# EAGLE board MCU (EAGLE 9.6.0)
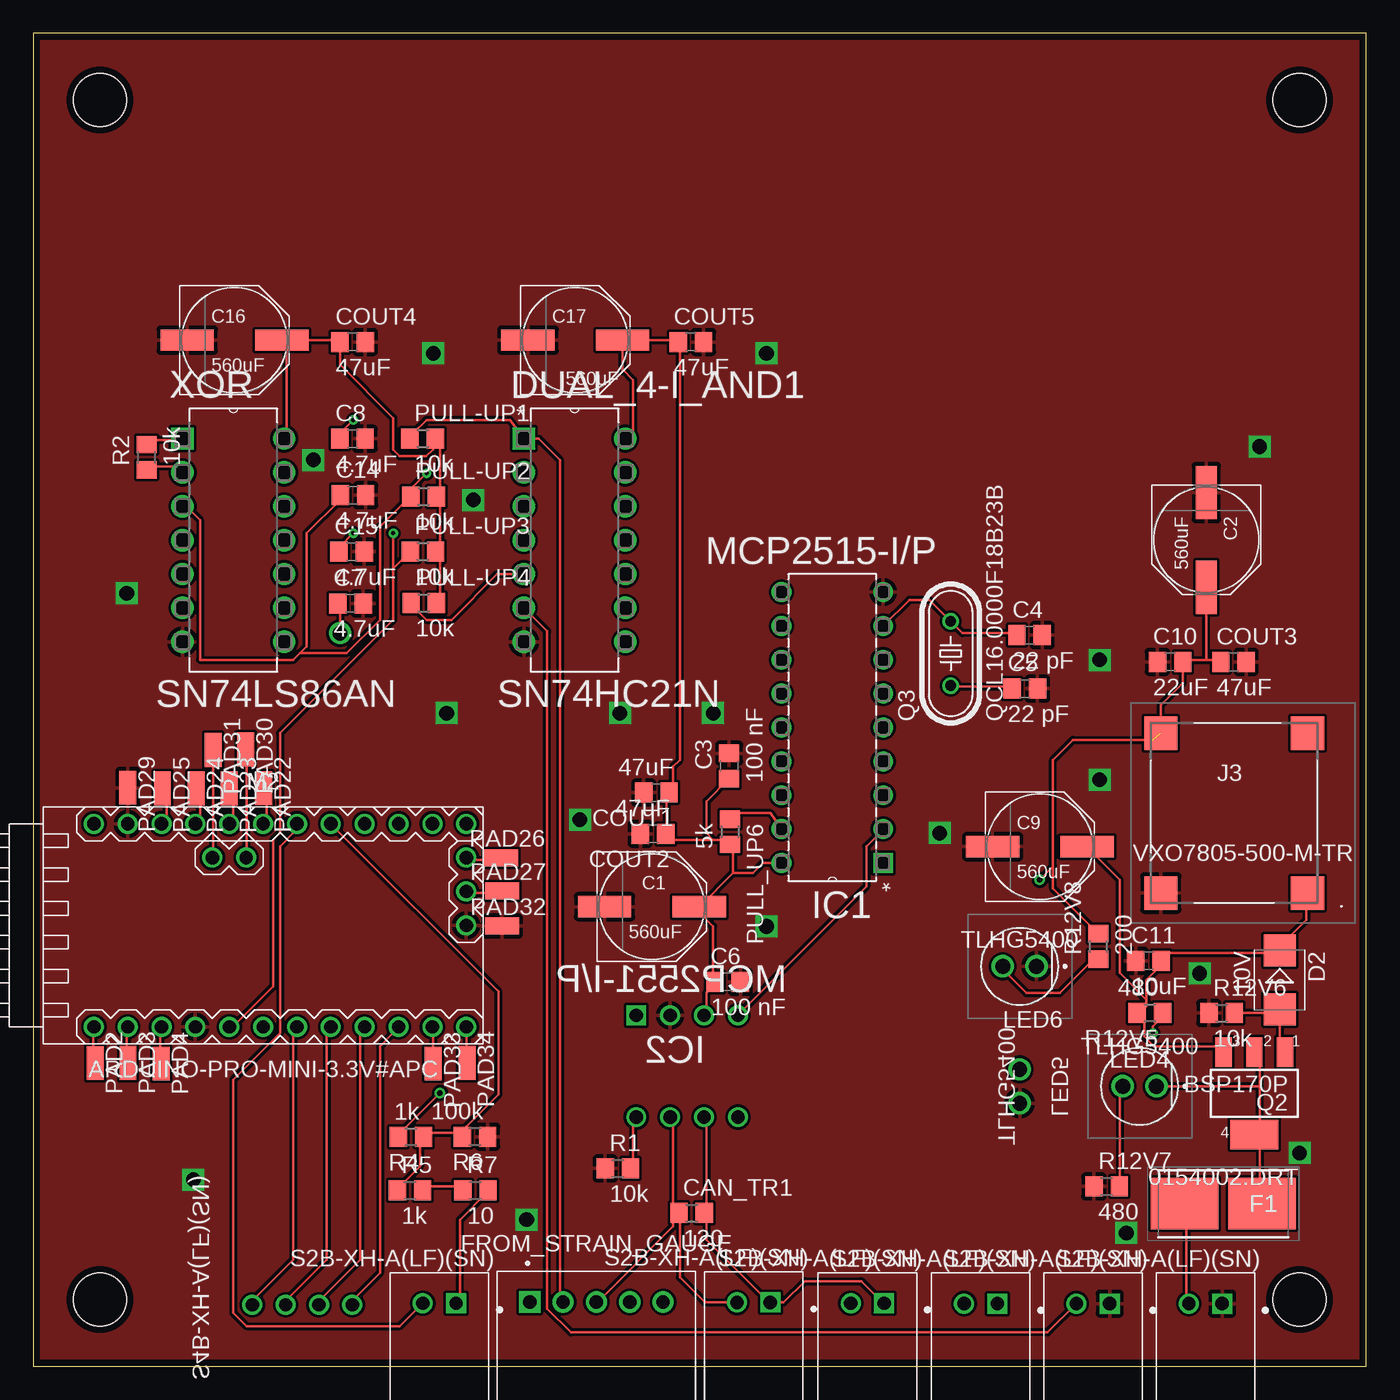
[diagram p0: board, top side]
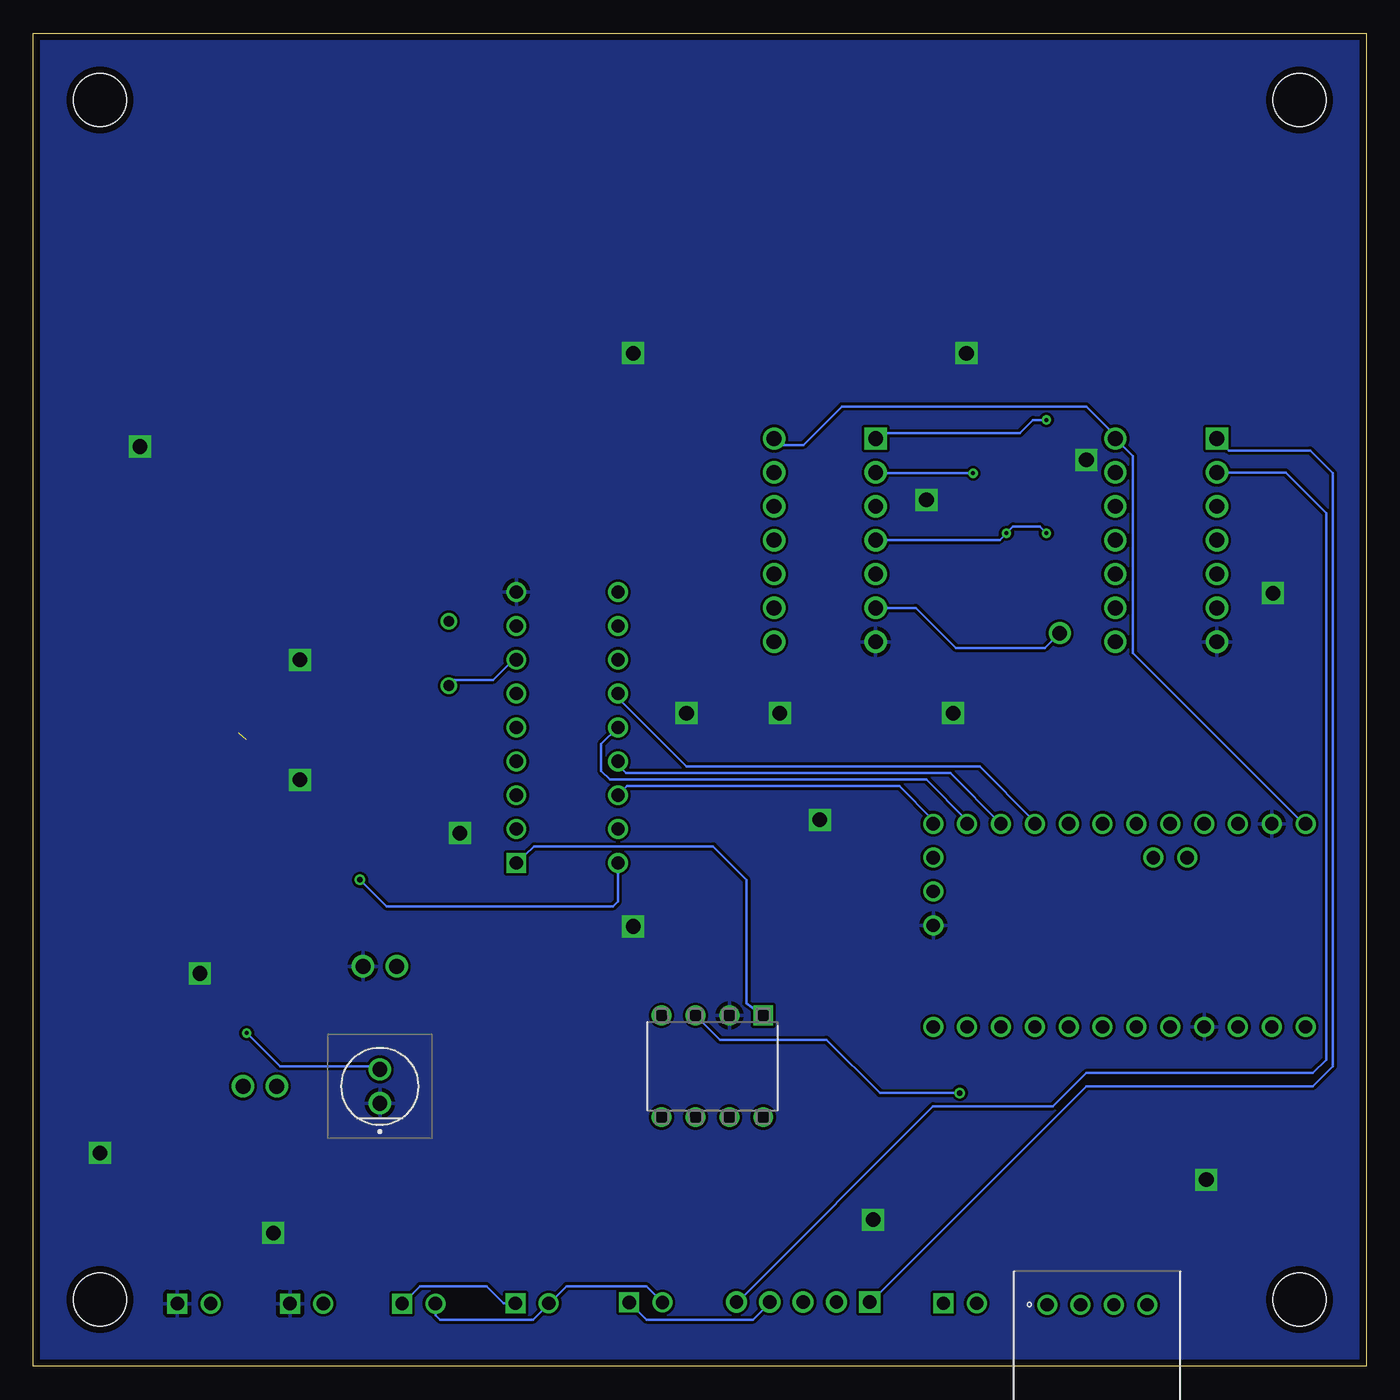
[diagram p1: board, bottom side, seen from below]

Size 100 x 100 mm. Coordinates in mm from the lower left corner, seen from the top.
Outline: 0,0 100,0 100,100 0,100 0,0
Copper layers (1*16): Top 0.035mm / dielectric 1.5mm / Bottom 0.035mm
Design rules "JLC_Vermilion2020": minimum track width 0.2mm, minimum drill 0.3mm, track to track 0.2mm, track to pad 0.3mm, pad to pad 0.3mm, via to via 0.2mm, smd to smd 0.2mm, copper to edge 0.5mm, drill to drill 0.25mm, minimum pad ring 0.2mm, minimum via ring 0.2mm, stop-mask expansion 0.055mm, vias tented up to drill 0.3mm, thermal gap 0.3mm
Net classes: 1 signal: width 0.3 mm, drill 0.4 mm, clearance 0.25 mm; 2 12V: width 1 mm, drill 1.1 mm, clearance 0.25 mm
Holes 4 mm at 5,95 5,5 95,5 95,95

## Footprints (pad centres in the part's own frame; a part is rotated, then mirrored left to right if it is on the bottom)
PANASONIC_F = smd 4 x 1.6: + 3.55,0; - -3.55,0
C0805 = smd 1.3 x 1.5: 1 -0.95,0; 2 0.95,0
JST_S2B-XH-A(LF)(SN) = drill 1 square: 1 -1.25,0 | drill 1: 2 1.25,0
R0805 = smd 1.3 x 1.5: 1 -0.95,0; 2 0.95,0
SMB = smd 2.4 x 2.4: A 2.2,0; C -2.2,0
DIP254P762X508-14 = drill 1.118 square: 1 -7.62,15.24 | drill 1.118: 2 -7.62,12.7; 3 -7.62,10.16; 4 -7.62,7.62; 5 -7.62,5.08; 6 -7.62,2.54; 7 -7.62,0; 8 0,0; 9 0,2.54; 10 0,5.08; 11 0,7.62; 12 0,10.16; 13 0,12.7; 14 0,15.24
FUSM9750X381N = smd 5.05 x 3.85: 1 -2.9,0; 2 2.9,0
JST_S5B-XH-A(LF)(SN) = drill 1 pad 1.59 square: 1 -5,0 | drill 1 pad 1.59: 2 -2.5,0; 3 0,0; 4 2.5,0; 5 5,0
DIP254P762X432-18 = drill 0.991 square: 1 -7.62,20.32 | drill 0.991: 2 -7.62,17.78; 3 -7.62,15.24; 4 -7.62,12.7; 5 -7.62,10.16; 6 -7.62,7.62; 7 -7.62,5.08; 8 -7.62,2.54; 9 -7.62,0; 10 0,0; 11 0,2.54; 12 0,5.08; 13 0,7.62; 14 0,10.16; 15 0,12.7; 16 0,15.24; 17 0,17.78; 18 0,20.32
DIP254P762X432-8 = drill 0.991 square: 1 -7.62,7.62 | drill 0.991: 2 -7.62,5.08; 3 -7.62,2.54; 4 -7.62,0; 5 0,0; 6 0,2.54; 7 0,5.08; 8 0,7.62
VXO7805500MTR = smd 2.5 x 2.5: 1 -5.5,6; 2 5.5,6; 3 5.5,-6; 4 -5.5,-6
TLHG5400 = drill 1.12 pad 1.68: 1 1.27,0; 2 -1.27,0
ARDUINO-PRO-MINI#APC = drill 1: J2.1 -1.27,5.08; J2.2 -3.81,5.08; J3.1 15.24,0; J3.2 15.24,2.54; J3.3 15.24,5.08; J6.1 -12.7,7.62; J6.2 -10.16,7.62; J6.3 -7.62,7.62; J6.4 -5.08,7.62; J6.5 -2.54,7.62; J6.6 0,7.62; J6.7 2.54,7.62; J6.8 5.08,7.62; J6.9 7.62,7.62; J6.10 10.16,7.62; J6.11 12.7,7.62; J6.12 15.24,7.62; J7.1 15.24,-7.62; J7.2 12.7,-7.62; J7.3 10.16,-7.62; J7.4 7.62,-7.62; J7.5 5.08,-7.62; J7.6 2.54,-7.62; J7.7 0,-7.62; J7.8 -2.54,-7.62; J7.9 -5.08,-7.62; J7.10 -7.62,-7.62; J7.11 -10.16,-7.62; J7.12 -12.7,-7.62
SMD1,27-2,54 = smd 1.27 x 2.54: 1 0,0
SOT223 = smd 1.219 x 2.235: 1 -2.311,-3.099; 2 0,-3.099; 3 2.311,-3.099 | smd 3.6 x 2.2: 4 0,3.099
HC49/S = drill 0.813: 1 -2.413,0; 2 2.413,0
S4B-XH-A(LF)(SN) = drill 1: 1 -0.02,3.75; 2 -0.02,1.25; 3 -0.02,-1.25; 4 -0.02,-3.75

## Placement (x,y rotation side)
C1  560uF  [PANASONIC_F]  46.4,34.47 0 top
C2  560uF  [PANASONIC_F]  88,62 270 top
C3  100 nF  [C0805]  52.2,45.04 90 top
C4  22 pF  [C0805]  74.74,54.84 0 top
C5  22 pF  [C0805]  74.39,50.84 0 top
C6  100 nF  [C0805]  52.09,28.84 0 top
C7  4.7uF  [C0805]  23.8,57.24 0 top
C8  4.7uF  [C0805]  23.94,69.59 0 top
C9  560uF  [PANASONIC_F]  75.52,38.98 0 top
C10  22uF  [C0805]  85.29,52.84 0 top
C11  10uF  [C0805]  83.66,30.42 0 top
C14  4.7uF  [C0805]  23.98,65.35 0 top
C15  4.7uF  [C0805]  23.88,61.11 0 top
C16  560uF  [PANASONIC_F]  15.09,76.98 0 top
C17  560uF  [PANASONIC_F]  40.66,76.98 0 top
CAN1  S2B-XH-A(LF)(SN)  [JST_S2B-XH-A(LF)(SN)]  71.08,4.69 180 top
CAN2  S2B-XH-A(LF)(SN)  [JST_S2B-XH-A(LF)(SN)]  62.58,4.72 180 top
CAN3  S2B-XH-A(LF)(SN)  [JST_S2B-XH-A(LF)(SN)]  54.04,4.79 180 top
CAN_TR1  120  [R0805]  49.39,11.49 0 top
COUT1  47uF  [C0805]  46.74,43.03 180 top
COUT2  47uF  [C0805]  46.49,39.95 180 top
COUT3  47uF  [C0805]  90.04,52.83 0 top
COUT4  47uF  [C0805]  23.95,76.84 0 top
COUT5  47uF  [C0805]  49.33,76.84 0 top
D2  10V  [SMB]  93.5,28.98 270 top
DUAL_4-I_AND1  SN74HC21N  [DIP254P762X508-14]  44.42,54.35 0 top
F1  0154002.DRT  [FUSM9750X381N]  89.28,12.19 0 top
FROM_BATTERY  S2B-XH-A(LF)(SN)  [JST_S2B-XH-A(LF)(SN)]  87.94,4.69 180 top
FROM_STRAIN_GAUGE  S5B-XH-A(LF)(SN)  [JST_S5B-XH-A(LF)(SN)]  42.25,4.82 0 top
FROM_TORQUE  S2B-XH-A(LF)(SN)  [JST_S2B-XH-A(LF)(SN)]  30.47,4.72 180 top
IC1  MCP2515-I/P  [DIP254P762X432-18]  56.14,58.08 180 top
IC2  MCP2551-I/P  [DIP254P762X432-8]  52.86,18.69 270 bottom
J3  VXO7805-500-M-TR  [VXO7805500MTR]  90.09,41.5 180 top
LED4  TLHG5400  [TLHG5400]  83,21 0 top
LED5  TLHG5400  [TLHG5400]  74,21 270 bottom
LED6  TLHG5400  [TLHG5400]  74,30 0 top
M2  ARDUINO-PRO-MINI-3.3V#APC  [ARDUINO-PRO-MINI#APC]  17.24,33.07 0 top
PAD2  [SMD1,27-2,54]  4.63,22.74 180 top
PAD3  [SMD1,27-2,54]  7.1,22.75 180 top
PAD4  [SMD1,27-2,54]  9.58,22.7 180 top
PAD22  [SMD1,27-2,54]  17.27,43.37 180 top
PAD23  [SMD1,27-2,54]  14.69,43.34 180 top
PAD24  [SMD1,27-2,54]  12.21,43.35 180 top
PAD25  [SMD1,27-2,54]  9.69,43.35 180 top
PAD26  [SMD1,27-2,54]  35.1,38.15 270 top
PAD27  [SMD1,27-2,54]  35.16,35.65 270 top
PAD29  [SMD1,27-2,54]  7.08,43.4 180 top
PAD30  [SMD1,27-2,54]  15.93,46.26 180 top
PAD31  [SMD1,27-2,54]  13.48,46.24 180 top
PAD32  [SMD1,27-2,54]  35.17,33.02 270 top
PAD33  [SMD1,27-2,54]  30.01,22.7 180 top
PAD34  [SMD1,27-2,54]  32.53,22.77 180 top
PULL-UP1  10k  [R0805]  29.21,69.6 0 top
PULL-UP2  10k  [R0805]  29.28,65.25 0 top
PULL-UP3  10k  [R0805]  29.23,61.12 0 top
PULL-UP4  10k  [R0805]  29.3,57.27 0 top
PULL_UP6  5k  [R0805]  52.26,40.09 270 top
Q2  BSP170P  [SOT223]  91.61,20.47 180 top
Q3  QCL16.0000F18B23B  [HC49/S]  68.83,53.47 90 top
R1  10k  [R0805]  43.86,14.84 0 top
R2  10k  [R0805]  8.49,68.19 90 top
R4  1k  [R0805]  28.33,17.19 180 top
R5  1k  [R0805]  28.25,13.19 0 top
R6  100k  [R0805]  33.13,17.22 180 top
R7  10  [R0805]  33.17,13.19 0 top
R12V5  480  [R0805]  83.77,26.49 180 top
R12V6  10k  [R0805]  89.15,26.49 0 top
R12V7  480  [R0805]  80.53,13.49 0 top
R12V8  200  [R0805]  79.91,31.49 90 top
TO_DRIVER  S4B-XH-A(LF)(SN)  [S4B-XH-A(LF)(SN)]  20.18,4.62 90 bottom
TO_POWER_SWITCH  S2B-XH-A(LF)(SN)  [JST_S2B-XH-A(LF)(SN)]  79.5,4.69 180 top
XOR  SN74LS86AN  [DIP254P762X508-14]  18.82,54.35 0 top

## Library data of the parts
C1-C11 C14-C17 COUT1-COUT5 = rcl; SPICEPREFIX: C
CAN1-CAN3 FROM_BATTERY FROM_TORQUE TO_POWER_SWITCH = S2B-XH-A_LF__SN_; DESCRIPTION: Connector Header Through Hole, Right Angle 2 position 0.098 _2.50mm_; DIGI-KEY_PART_NUMBER: 455-2257-ND; DIGI-KEY_PURCHASE_URL: https://www.digikey.com/product-detail/en/jst-sales-america-inc/S2B-XH-A_LF__SN_/455-2257-ND/1651055?utm_source=snapeda&utm_medium=aggregator&utm_campaign=symbol; MF: JST Sales; MP: S2B-XH-A_LF__SN_; PACKAGE: None
CAN_TR1 PULL-UP1-PULL-UP4 PULL_UP6 R1 R2 R4-R7 R12V5-R12V8 = rcl; SPICEPREFIX: R
D2 = diode
DUAL_4-I_AND1 = SN74HC21N; AVAILABILITY: Unavailable; DESCRIPTION: AND Gate IC 2 Channel 14-PDIP; MF: Texas Instruments; MP: SN74HC21N; PACKAGE: DIP-14 Texas Instruments; PRICE: None
F1 = 0154002.DRT; DESCRIPTION: Littelfuse 2A T Surface Mount Fuse, 125V ac/dc; HEIGHT: 3.81mm; MANUFACTURER_NAME: LITTELFUSE; MANUFACTURER_PART_NUMBER: 0154002.DRT; MOUSER_PART_NUMBER: 576-0154002.DRT; MOUSER_PRICE-STOCK: https://www.mouser.co.uk/ProductDetail/Littelfuse/0154002DRT?qs=2VFNtWizgicDQ8R7JxIsmA%3D%3D
FROM_STRAIN_GAUGE = S5B-XH-A_LF__SN_; AVAILABILITY: Unavailable; DESCRIPTION: Connector Header Through Hole, Right Angle 5 position 0.098 _2.50mm_; MF: JST Sales; MP: S5B-XH-A_LF__SN_; PACKAGE: None; PRICE: None
IC1 = MCP2515-I_P; AVAILABILITY: Unavailable; DESCRIPTION: MCP2515 Series 5.5 V 1 Mb/s Stand Alone SPI Interface CAN Controller - PDIP-18; MF: Microchip; MP: MCP2515-I/P; PACKAGE: DIP-18 Microchip; PRICE: None
IC2 = MCP2551-I_P; AVAILABILITY: Unavailable; DESCRIPTION: MCP2551 Series 5.5 V 1 Mb/s Surface Mount High-Speed CAN Transceiver - PDIP-8; MF: Microchip; MP: MCP2551-I/P; PACKAGE: DIP-8 Microchip; PRICE: None
J3 = VXO7805-500-M-TR; DESCRIPTION: Module DC-DC 24VIN 1-OUT 5V 0.5A 2.5W 4-Pin SMD Module T/R; HEIGHT: 3.5mm; MANUFACTURER_NAME: CUI Inc; MANUFACTURER_PART_NUMBER: VXO7805-500-M-TR; MOUSER_PART_NUMBER: 490-VXO7805-500-M-TR; MOUSER_PRICE-STOCK: https://www.mouser.co.uk/ProductDetail/CUI-Inc/VXO7805-500-M-TR?qs=GBLSl2AkirsIOUn2Flq1hQ%3D%3D
LED4-LED6 = TLHG5400; DESCRIPTION: Vishay TLHG5400, 575 nm Green LED, 5mm (T-1 3/4) Round Through Hole package; HEIGHT: 9mm; MANUFACTURER_NAME: Vishay; MANUFACTURER_PART_NUMBER: TLHG5400; MOUSER_PART_NUMBER: 78-TLHG5400; MOUSER_PRICE-STOCK: https://www.mouser.com/Search/Refine.aspx?Keyword=78-TLHG5400
M2 = diy-modules
PAD2-PAD4 PAD22-PAD27 PAD29-PAD34 = wirepad
Q2 = transistor-fet
Q3 = adafruit; OC_FARNELL: 1667008; OC_NEWARK: unknown
TO_DRIVER = S4B-XH-A_LF__SN_; AVAILABILITY: Unavailable; DESCRIPTION: Connector Header Through Hole, Right Angle 4 position 0.098 _2.50mm_; MF: JST Sales; MP: S4B-XH-A_LF__SN_; PACKAGE: None; PRICE: None
XOR = SN74LS86AN; AVAILABILITY: Unavailable; DESCRIPTION: XOR _Exclusive OR_ IC 4 Channel 14-SOP; MF: Texas Instruments; MP: SN74LS86AN; PACKAGE: DIP-14 Texas Instruments; PRICE: None

## Nets
+5V: C1.+ C2.+ C3.1 C6.1 C10.2 C16.+ C17.+ COUT1.1 COUT2.1 COUT3.1 COUT4.1 COUT5.1 DUAL_4-I_AND1.14 IC1.18 IC2.3 J3.3 M2.J6.1 PULL-UP1.2 PULL-UP2.2 PULL-UP3.2 PULL-UP4.2 PULL_UP6.2 R4.2 R12V8.2 XOR.14
+12V: C9.+ C11.2 D2.C J3.1 Q2.3 R12V5.2
CANH: CAN1.2 CAN2.2 CAN3.2 CAN_TR1.1 FROM_STRAIN_GAUGE.3 IC2.7
CANL: CAN1.1 CAN2.1 CAN3.1 CAN_TR1.2 FROM_STRAIN_GAUGE.4 IC2.6
DRIVER_ALERT_AL: DUAL_4-I_AND1.5 PULL-UP4.1
GND: C1.- C2.- C3.2 C4.2 C5.2 C6.2 C7.2 C8.2 C9.- C10.1 C11.1 C14.2 C15.2 C16.- C17.- COUT1.2 COUT2.2 COUT3.2 COUT4.2 COUT5.2 DUAL_4-I_AND1.7 FROM_BATTERY.1 IC1.9 IC2.2 J3.2 LED5.1 LED6.1 M2.J3.1 M2.J6.2 M2.J7.9 PAD29.1 PAD32.1 R1.1 R6.1 R12V6.1 R12V7.1 TO_POWER_SWITCH.1 XOR.7
MCU_ALERT_AL: C15.1 DUAL_4-I_AND1.4 M2.J7.8 PULL-UP3.1
N$1: LED4.2 R12V7.2
N$2: M2.J7.3 TO_DRIVER.1
N$3: M2.J7.12 PAD2.1
N$4: M2.J7.11 PAD3.1
N$5: D2.A Q2.1 R12V6.2
N$6: F1.1 FROM_BATTERY.2
N$7: F1.2 LED4.1 Q2.2 Q2.4
N$8: M2.J7.10 PAD4.1
N$10: M2.J6.6 PAD22.1
N$11: M2.J6.5 PAD23.1
N$12: M2.J6.4 PAD24.1
N$13: IC1.15 M2.J6.10
N$14: M2.J6.3 PAD25.1
N$16: R5.2 R7.1
N$17: M2.J3.3 PAD26.1
N$18: LED5.2 R12V5.1
N$19: LED6.2 R12V8.1
N$20: IC1.13 M2.J6.9
N$21: IC1.14 M2.J6.11
N$22: IC1.16 M2.J6.12
N$23: M2.J7.5 TO_DRIVER.3
N$24: M2.J7.6 TO_DRIVER.4
N$40: M2.J3.2 PAD27.1
N$42: M2.J2.1 PAD30.1
N$49: M2.J2.2 PAD31.1
N$52: M2.J7.4 TO_DRIVER.2
N$54: M2.J7.2 PAD33.1
N$55: M2.J7.1 PAD34.1
N$56: IC1.17 PULL_UP6.1
N$58: C4.1 IC1.8 Q3.2
N$59: C5.1 IC1.7 Q3.1
N$60: IC2.8 R1.2
N$62: IC1.2 IC2.4
N$63: FROM_STRAIN_GAUGE.1 R2.2 XOR.1
N$64: C7.1 DUAL_4-I_AND1.6 TO_POWER_SWITCH.2
N$67: FROM_STRAIN_GAUGE.5 R2.1 XOR.2
N$68: IC1.1 IC2.1
TORQUE_I_OUT: FROM_TORQUE.2 M2.J6.7
TORQUE_V_OUT_[0/+5]: M2.J6.8 R4.1 R5.1 R6.2
TORQUE_V_OUT_[-5/+5]: FROM_TORQUE.1 R7.2
TS_DISCONNECT: C14.1 DUAL_4-I_AND1.2 PULL-UP2.1 XOR.3
TS_OOR: C8.1 DUAL_4-I_AND1.1 FROM_STRAIN_GAUGE.2 PULL-UP1.1

## Tracks (layer width: path | path; a pad name or v marks a point on that pad's centre or on a via)
+5V  (via drill 0.4)  (1 unrouted)
  Top 0.2: PULL-UP4.2 30.5,57.5 30.5,61 PULL-UP3.2 30.5,61.5 30.5,65 PULL-UP2.2 30.5,65.5 30.5,69.5 PULL-UP1.2 30,69.44 30,68.78 29.48,68.27 27.49,68.27 27,68.76 27,71.14 23,75.14 COUT4.1 23,77 19,77 C16.+ 19,76.5 19,70 XOR.14 | DUAL_4-I_AND1.14 44.91,70.08 45,70.17 45,74 44.21,74.79 | 44.21,74.66 44.21,74.79 | 76.5,37.5 76.5,45.5 78,47 84,47 | 79.5,32.5 R12V8.2 76.5,35.85 76.5,37.5 | 88,53 86.5,53 C10.2 86.24,51.24 84.59,49.59 J3.3 | 88,53 89,53 COUT3.1 | 88,53 C2.+ | 51,39.5 47.5,39.5 COUT2.1 47.5,40 47.5,43 COUT1.1 48,43.5 48,45 48.5,45.5 48.5,76.72 COUT5.1 48,77 44.5,77 C17.+ 44.21,75 44.21,74.79 | 51,39.5 52,39.5 PULL_UP6.2 52.5,39 52.5,37 | C3.1 50.5,42.38 50.5,40 51,39.5 | 52.5,37 50,34.5 C1.+ 50,34 51,33 51,29 C6.1 51,28.5 50.5,28 50.5,26.5 IC2.3 | v30.5,20.5 27.5,17.5 R4.2 | v75.5,36.5 76.5,37.5 | 52.5,37 54,37 54.76,37.76 IC1.18
  Bottom 0.2: M2.J6.1 5,41 17.5,53.5 17.5,68.27 XOR.14 19,70 21,72 39.33,72 42.22,69.11 43.94,69.11 DUAL_4-I_AND1.14 | v30.5,20.5 36.5,20.5 40.5,24.5 48.5,24.5 50,26 IC2.3 | v75.5,36.5 73.5,34.5 56.5,34.5 56.14,34.86 IC1.18
+12V
  Top 0.2: J3.1 95.5,35.5 95.5,33.5 93.5,31.5 D2.C 93.5,31 85,31 85,30.5 C11.2 84.5,30 83.5,29 83.5,27.5 | 83.5,27.5 83.5,27 83,26.5 R12V5.2 | Q2.3 89,24 84.08,24 83.35,24.73 83.35,25.96 R12V5.2 | 83,26 R12V5.2 | 83.5,27.5 81.5,29.5 81.5,36.5 79.5,38.5 C9.+
CANH
  Top 0.2: CAN_TR1.1 48,11.5 48,18.5 IC2.7 | CAN3.2 50.38,4.79 48.5,6.66 48.5,11 CAN_TR1.1 | FROM_STRAIN_GAUGE.3 42.5,5 48,10.5 48,11 CAN_TR1.1
  Bottom 0.2: CAN1.2 69.83,3.83 69.5,3.5 62.5,3.5 61.5,4.5 CAN2.2 61,5 60,6 54,6 53,5 CAN3.2
CANL
  Top 0.2: IC2.6 50.5,18.5 50.5,11.5 CAN_TR1.2 50.5,11 50.5,9.5 55,5 CAN3.1 56.29,4.79 57.89,6.38 62.12,6.38 63.5,5 CAN2.1
  Bottom 0.2: CAN2.1 64.72,4.72 66,6 71,6 72,5 CAN1.1 | FROM_STRAIN_GAUGE.4 45,4.5 46,3.5 54,3.5 55,4.5 CAN3.1
DRIVER_ALERT_AL
  Top 0.2: PULL-UP4.1 28.5,57 29.5,56 31.37,56 34.8,59.43 DUAL_4-I_AND1.5
GND  (via drill 1.1)
  other vias: 55,33 12,14 31,49 33,65 68,40 37,11 80,44 51,49 30,76 7,58 21,68 44,49 82,10 95,16 87.5,29.46 80,53 41,41 55,76 92,69
  pour Top: -1,105 -6,100 -6,-10 109,-10 109,98 102,105
  pour Bottom: -1,106 -8,99 -8,-6 -1,-13 109,-13 110,-12 110,104 1,104
MCU_ALERT_AL  (via drill 0.3)
  Top 0.2: v24,62.5 23,61.5 C15.1 | PULL-UP3.1 27,59.84 v27,62.5 27,56 18.5,47.5 18.5,40 18,39.5 18,28.5 15,25.5 M2.J7.8
  Bottom 0.2: v24,62.5 24.5,63 26.5,63 v27,62.5 27.5,62 36.5,62 DUAL_4-I_AND1.4
N$1
  Top 0.2: R12V7.2 81.5,13.5 81.5,21 LED4.2
N$2
  Top 0.2: TO_DRIVER.1 24,5 26,7 26,24 27,25 M2.J7.3
N$3
  Top 0.2: PAD2.1 4.5,23 4.5,25 M2.J7.12
N$4
  Top 0.2: PAD3.1 7,23 7,25 M2.J7.11
N$5
  Top 0.2: 93.5,26.5 90.5,26.5 R12V6.2 | 93.5,26.5 93.5,24 Q2.1 | 93.5,26.5 D2.A
N$6
  Top 0.2: FROM_BATTERY.2 86.5,5 86.5,12 F1.1
N$7
  Top 0.2: 92,21 92,17.5 Q2.4 92,17 92,12.5 F1.2 | 92,21 92,23.5 Q2.2 | 92,21 LED4.1
N$8
  Top 0.2: PAD4.1 9.5,23 9.5,25 M2.J7.10
N$10
  Top 0.2: PAD22.1 17.5,43 17.5,41 M2.J6.6
N$11
  Top 0.2: PAD23.1 15,43 15,41 M2.J6.5
N$12
  Top 0.2: PAD24.1 12.5,43 12.5,41 M2.J6.4
N$13
  Bottom 0.2: M2.J6.10 31.21,44.5 55.51,44.5 56.14,45.13 IC1.15
N$14
  Top 0.2: PAD25.1 10,43 10,41 M2.J6.3
N$16
  Top 0.2: R5.2 29.5,13.5 32,13.5 R7.1
N$17
  Top 0.2: PAD26.1 35,38 32.5,38 M2.J3.3
N$18  (via drill 0.3)
  Top 0.2: v84,25 84,25.5 84.5,26 R12V5.1
  Bottom 0.2: v84,25 81.5,22.5 74.23,22.5 LED5.2
N$19
  Top 0.2: LED6.2 72.73,29.77 74.5,28 77,28 79.5,30.5 R12V8.1
N$20
  Bottom 0.2: IC1.13 56,50 51,45 29,45 25,41 M2.J6.9
N$21
  Bottom 0.2: IC1.14 57.39,46.67 57.39,44.67 56.73,44.01 33.01,44.01 30,41 M2.J6.11
N$22
  Bottom 0.2: IC1.16 55.46,43.52 35.02,43.52 32.5,41 M2.J6.12
N$23
  Top 0.2: TO_DRIVER.3 19,5 22,8 22,25 M2.J7.5
N$24
  Top 0.2: TO_DRIVER.4 16.5,5 19.5,8 19.5,25 M2.J7.6
N$40
  Top 0.2: PAD27.1 35,35.5 32.5,35.5 M2.J3.2
N$42
  Top 0.2: PAD30.1 16,46 16,38.5 M2.J2.1
N$49
  Top 0.2: PAD31.1 13.5,46 13.5,38.5 M2.J2.2
N$52
  Top 0.2: TO_DRIVER.2 21.5,5 24.5,8 24.5,25 M2.J7.4
N$54
  Top 0.2: PAD33.1 30,23 30,25 M2.J7.2
N$55
  Top 0.2: PAD34.1 32.5,23 32.5,25 M2.J7.1
N$56
  Top 0.2: PULL_UP6.1 52.72,41.5 55.3,41.5 IC1.17
N$58
  Top 0.2: C4.1 73.5,55 69.71,55 Q3.2 67.21,57.5 65.72,57.5 IC1.8
N$59
  Top 0.2: C5.1 73,51 69,51 Q3.1
  Bottom 0.2: IC1.7 64,53 65.5,51.5 68.5,51.5 Q3.1
N$60
  Top 0.2: R1.2 45,15 45,18.5 IC2.8
N$62
  Top 0.2: IC2.4 53,26.5 62.5,36 62.5,39 63.5,40 IC1.2
N$63
  Top 0.2: R2.2 8.5,69.5 11,69.5 XOR.1
  Bottom 0.2: FROM_STRAIN_GAUGE.1 37,5 21,21 4,21 2.5,22.5 2.5,67 4.2,68.69 10.3,68.69 XOR.1 11,69.5
N$64  (via drill 1.1)
  Top 0.2: TO_POWER_SWITCH.2 76.1,2.54 40.33,2.54 38.55,4.32 38.55,55.14 DUAL_4-I_AND1.6 | C7.1 23,57.09 v23,55
  Bottom 0.2: v23,55 24.11,53.89 30.8,53.89 33.8,56.89 DUAL_4-I_AND1.6
N$67
  Top 0.2: R2.1 8.5,67.5 11,67.5 XOR.2
  Bottom 0.2: FROM_STRAIN_GAUGE.5 47,5 32.5,19.5 23.5,19.5 21,22 4,22 3,23 3,64 6.05,67.05 XOR.2
N$68
  Bottom 0.2: IC2.1 46.5,27.23 46.5,36.5 49,39 62.42,39 IC1.1
TORQUE_I_OUT
  Top 0.2: 29,4.5 FROM_TORQUE.2 27.5,3 16,3 15,4 15,21.5 18.5,25 18.5,39 19.5,40 19.5,40.5 M2.J6.7
TORQUE_V_OUT_[0/+5]
  Top 0.2: R5.1 27.5,13.5 29,15 29,17 R4.1 29.5,17.5 32,17.5 R6.2 32.5,17.5 32.5,18 34.89,20.39 34.89,28.11 22.5,40.5 M2.J6.8
TORQUE_V_OUT_[-5/+5]
  Top 0.2: R7.2 34,13 32,11 32,5 FROM_TORQUE.1
TS_DISCONNECT  (via drill 0.3)
  Top 0.2: 20,53.5 19.5,53 12.5,53 12.5,63.5 11.5,64.5 XOR.3 | 20,53.5 20.5,54 20.5,62.5 23,65 C14.1 | 20,53.5 23.5,53.5 26,56 26,63 28,65 PULL-UP2.1 28.5,65.5 28.5,66 v29.5,67
  Bottom 0.2: v29.5,67 36.5,67 DUAL_4-I_AND1.2
TS_OOR  (via drill 0.3)
  Top 0.2: v24,71 23,70 C8.1 | PULL-UP1.1 28.5,70 29.5,71 35.77,71 DUAL_4-I_AND1.1 37.91,69.59 39.5,68 39.5,5 FROM_STRAIN_GAUGE.2
  Bottom 0.2: v24,71 25,71 26,70 36.5,70 DUAL_4-I_AND1.1